# Altium PCB PHOTODIODE_V1.3.0.PcbDoc (part 2 of 3)
Units mm, origin at the board's own origin, x right, y up, seen from the top; angles counter-clockwise.
Board outline 86 x 86 mm, 4 copper layers (L1_TOP, L2_GND, L3_SIGNAL, L4_BOT); 134 components, 78 nets, 520 pads, 1315 vias.
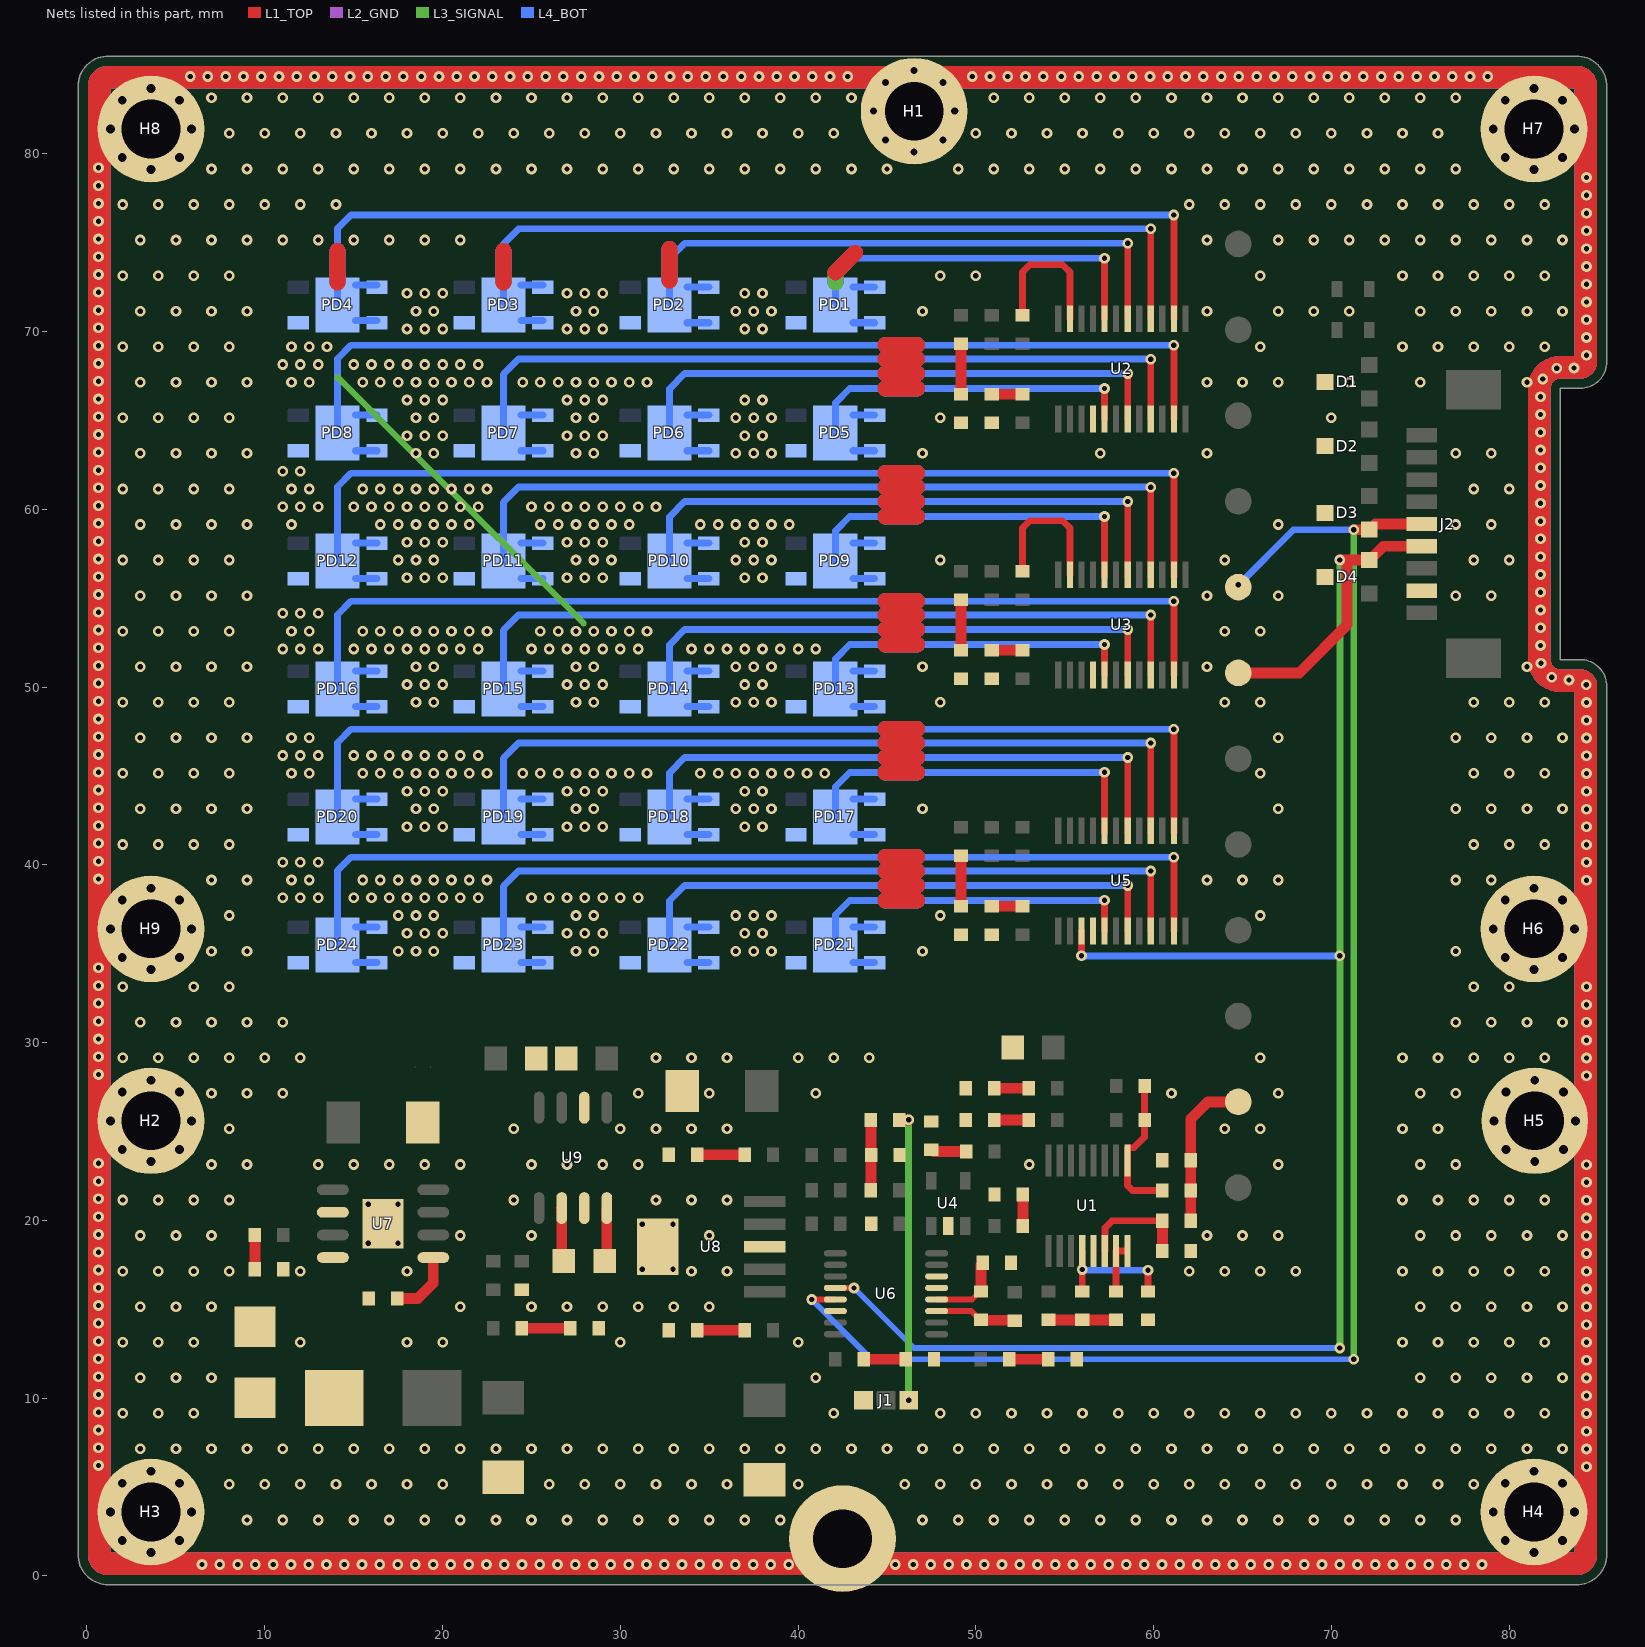
[diagram p4: the nets of this part, all layers, seen from the top]

## Via types
v1: diameter 0.6, hole 0.3, L1_TOP to L4_BOT, tented both sides, 1045 vias
v2: diameter 0.6, hole 0.3, L1_TOP to L4_BOT, 270 vias

## Nets (pads, with @x,y where several pads share a name; then routed paths per layer and width w, separated by ;. In a path a pad name is that pad's centre, name@x,y a point inside that pad or via, vN(x,y) a via of type N, cw(c..) or ccw(c..) an arc to the next point about the centre after c; other vN are vias at no path point) (continued)
GND: C4.1 C5.1 C6.1 C7.1 C8.1 C12.1 C13.1 C16.1 C17.1 C20.1 C21.1 C22.2 C25.1 C26.1 C30.1 C31.1 C32.1 C36.2 C37.2 C38.1 C39.1 C42.2 C43.2 C44.1 C45.1 C46.2 C48.1 D1.2 D2.2 D3.2 D4.2 D5.1 H1.1 H2.1 H3.1 H4.1 H5.1 H6.1 H7.1 H8.1 H9.1 J1.1 J2.2 pad.1 PD1.1 PD2.1 PD3.1 PD4.1 PD5.1 PD6.1 PD7.1 PD8.1 PD9.1 PD10.1 PD11.1 PD12.1 PD13.1 PD14.1 PD15.1 PD16.1 PD17.1 PD18.1 PD19.1 PD20.1 PD21.1 PD22.1 PD23.1 PD24.1 R13.1 R17.2 R23.1 U1.13 U2.4 U3.4 U4.2 U5.4 U6.5 U6.6 U6.14 U7.6 U7.9 U8.3 U8.6 U9.3 U9.6 | length 1497.7
  L1_TOP w0.9: 14.1,72.749 14.1,74.527 ; 23.434,72.749 23.434,74.527 ; 32.768,72.869 32.768,74.647 ; 42.102,73.322 43.202,74.422 ; 44.909,38.002 46.687,38.002 ; 44.909,38.838 46.687,38.838 ; 44.909,39.653 46.687,39.653 ; 44.909,40.435 46.687,40.435 ; 44.909,45.202 46.687,45.202 ; 44.909,46.038 46.687,46.038 ; 44.909,46.853 46.687,46.853 ; 44.909,47.635 46.687,47.635 ; 44.909,52.402 46.687,52.402 ; 44.909,53.238 46.687,53.238 ; 44.909,54.053 46.687,54.053 ; 44.909,54.835 46.687,54.835 ; 44.909,59.602 46.687,59.602 ; 44.909,60.438 46.687,60.438 ; 44.909,61.253 46.687,61.253 ; 44.909,62.035 46.687,62.035 ; 44.909,66.802 46.687,66.802 ; 44.909,67.638 46.687,67.638 ; 44.909,68.453 46.687,68.453 ; 44.909,69.235 46.687,69.235
  L1_TOP w1.27: 0.685,83.794 0.685,82.209 0.685,81.209 0.685,80.209 0.685,79.209 0.685,78.209 0.685,77.209 0.685,76.209 0.685,75.209 0.685,74.209 0.685,73.209 0.685,72.209 0.685,71.209 0.685,70.209 0.685,69.209 0.685,68.209 0.685,67.209 0.685,66.209 0.685,65.209 0.685,64.209 0.685,63.209 0.685,62.209 0.685,61.209 0.685,60.209 0.685,59.209 0.685,58.209 0.685,57.209 0.685,56.209 0.685,55.209 0.685,54.209 0.685,53.209 0.685,52.209 0.685,51.209 0.685,50.209 0.685,49.209 0.685,48.209 0.685,47.209 0.685,46.209 0.685,45.209 0.685,44.209 0.685,43.209 0.685,42.209 0.685,41.209 0.685,40.209 0.685,39.209 0.685,38.209 0.685,37.209 0.685,36.209 0.685,35.209 0.685,34.209 0.685,33.209 0.685,32.209 0.685,31.209 0.685,30.209 0.685,29.209 0.685,28.209 0.685,27.209 0.685,26.209 0.685,25.209 0.685,24.209 0.685,23.209 0.685,22.209 0.685,21.209 0.685,20.209 0.685,19.209 0.685,18.209 0.685,17.209 0.685,16.209 0.685,15.209 0.685,14.209 0.685,13.209 0.685,12.209 0.685,11.209 0.685,10.209 0.685,9.209 0.685,8.209 0.685,7.209 0.685,6.209 0.685,5.209 0.685,4.209 0.685,3.209 0.685,2.209 0.685,1.2 ccw(c1.2,1.2) 1.2,0.685 ; 0.685,83.8 cw(c1.2,83.8) 1.2,84.315 2.802,84.315 3.802,84.315 4.802,84.315 5.802,84.315 6.802,84.315 7.802,84.315 8.802,84.315 9.802,84.315 10.802,84.315 11.802,84.315 12.802,84.315 13.802,84.315 14.802,84.315 15.802,84.315 16.802,84.315 17.802,84.315 18.802,84.315 19.802,84.315 20.802,84.315 21.802,84.315 22.802,84.315 23.802,84.315 24.802,84.315 25.802,84.315 26.802,84.315 27.802,84.315 28.802,84.315 29.802,84.315 30.802,84.315 31.802,84.315 32.802,84.315 33.802,84.315 34.802,84.315 35.802,84.315 36.802,84.315 37.802,84.315 38.802,84.315 39.802,84.315 40.802,84.315 41.802,84.315 42.802,84.315 43.802,84.315 44.802,84.315 45.655,84.315 46.53,84.315 47.405,84.315 48.802,84.315 49.802,84.315 50.802,84.315 51.802,84.315 52.802,84.315 53.802,84.315 54.802,84.315 55.802,84.315 56.802,84.315 57.802,84.315 58.802,84.315 59.802,84.315 60.802,84.315 61.802,84.315 62.802,84.315 63.802,84.315 64.802,84.315 65.802,84.315 66.802,84.315 67.802,84.315 68.802,84.315 69.802,84.315 70.802,84.315 71.802,84.315 72.802,84.315 73.802,84.315 74.802,84.315 75.802,84.315 76.802,84.315 77.802,84.315 78.802,84.315 79.802,84.315 80.802,84.315 81.802,84.315 82.802,84.315 83.794,84.315 ; 1.206,0.685 2.475,0.685 3.475,0.685 4.475,0.685 5.475,0.685 6.475,0.685 7.475,0.685 8.475,0.685 9.475,0.685 10.475,0.685 11.475,0.685 12.475,0.685 13.475,0.685 14.475,0.685 15.475,0.685 16.475,0.685 17.475,0.685 18.474,0.685 19.474,0.685 20.474,0.685 21.474,0.685 22.474,0.685 23.474,0.685 24.474,0.685 25.474,0.685 26.474,0.685 27.474,0.685 28.474,0.685 29.474,0.685 30.474,0.685 31.474,0.685 32.474,0.685 33.474,0.685 34.474,0.685 35.474,0.685 36.474,0.685 37.474,0.685 38.474,0.685 39.474,0.685 40.474,0.685 42.5,0.685 44.474,0.685 45.474,0.685 46.474,0.685 47.474,0.685 48.474,0.685 49.474,0.685 50.474,0.685 51.474,0.685 52.474,0.685 53.474,0.685 54.474,0.685 55.474,0.685 56.474,0.685 57.474,0.685 58.474,0.685 59.474,0.685 60.474,0.685 61.474,0.685 62.474,0.685 63.474,0.685 64.474,0.685 65.474,0.685 66.474,0.685 67.474,0.685 68.474,0.685 69.474,0.685 70.474,0.685 71.474,0.685 72.474,0.685 73.474,0.685 74.474,0.685 75.474,0.685 76.474,0.685 77.474,0.685 78.474,0.685 79.474,0.685 80.474,0.685 81.474,0.685 82.474,0.685 83.8,0.685 ccw(c83.8,1.2) 84.315,1.2 ; 83.8,84.315 cw(c83.8,83.8) 84.315,83.8 84.315,82.665 84.315,81.665 84.315,80.665 84.315,79.665 84.315,78.665 84.315,77.665 84.315,76.665 84.315,75.665 84.315,74.665 84.315,73.665 84.315,72.665 84.315,71.665 84.315,70.665 84.315,69.665 84.315,68.31 ; 84.315,1.204 84.315,2.139 84.315,3.139 84.315,4.139 84.315,5.139 84.315,6.139 84.315,7.139 84.315,8.139 84.315,9.139 84.315,10.139 84.315,11.139 84.315,12.139 84.315,13.139 84.315,14.139 84.315,15.139 84.315,16.139 84.315,17.139 84.315,18.139 84.315,19.139 84.315,20.139 84.315,21.139 84.315,22.139 84.315,23.139 84.315,24.139 84.315,25.139 84.315,26.139 84.315,27.139 84.315,28.139 84.315,29.139 84.315,30.139 84.315,31.139 84.315,32.139 84.315,33.139 84.315,34.139 84.315,35.139 84.315,36.139 84.315,37.139 84.315,38.139 84.315,39.139 84.315,40.139 84.315,41.139 84.315,42.139 84.315,43.139 84.315,44.139 84.315,45.139 84.315,46.139 84.315,47.139 84.315,48.139 84.315,49.139 84.315,50.05 ccw(c84,50.05) 84,50.365 82.886,50.365 cw(c82.886,51.55) 81.701,51.55 81.701,52.316 81.701,53.316 81.701,54.316 81.701,55.316 81.701,56.316 81.701,57.316 81.701,58.316 81.701,59.316 81.701,60.316 81.701,61.316 81.701,62.316 81.701,63.316 81.701,64.316 81.701,65.316 81.701,66.806 cw(c82.886,66.806) 82.886,67.991 84,67.991 ccw(c84,68.306) 84.315,68.306
  L2_GND w0.9: 14.1,72.749 14.1,74.527 ; 23.434,72.749 23.434,74.527 ; 32.768,72.869 32.768,74.647 ; 42.102,73.322 43.202,74.422 ; 44.909,38.002 46.687,38.002 ; 44.909,38.838 46.687,38.838 ; 44.909,39.653 46.687,39.653 ; 44.909,40.435 46.687,40.435 ; 44.909,45.202 46.687,45.202 ; 44.909,46.038 46.687,46.038 ; 44.909,46.853 46.687,46.853 ; 44.909,47.635 46.687,47.635 ; 44.909,52.402 46.687,52.402 ; 44.909,53.238 46.687,53.238 ; 44.909,54.053 46.687,54.053 ; 44.909,54.835 46.687,54.835 ; 44.909,59.602 46.687,59.602 ; 44.909,60.438 46.687,60.438 ; 44.909,61.253 46.687,61.253 ; 44.909,62.035 46.687,62.035 ; 44.909,66.802 46.687,66.802 ; 44.909,67.638 46.687,67.638 ; 44.909,68.453 46.687,68.453 ; 44.909,69.235 46.687,69.235
  L2_GND w1.27: 0.685,83.794 0.685,82.209 0.685,81.209 0.685,80.209 0.685,79.209 0.685,78.209 0.685,77.209 0.685,76.209 0.685,75.209 0.685,74.209 0.685,73.209 0.685,72.209 0.685,71.209 0.685,70.209 0.685,69.209 0.685,68.209 0.685,67.209 0.685,66.209 0.685,65.209 0.685,64.209 0.685,63.209 0.685,62.209 0.685,61.209 0.685,60.209 0.685,59.209 0.685,58.209 0.685,57.209 0.685,56.209 0.685,55.209 0.685,54.209 0.685,53.209 0.685,52.209 0.685,51.209 0.685,50.209 0.685,49.209 0.685,48.209 0.685,47.209 0.685,46.209 0.685,45.209 0.685,44.209 0.685,43.209 0.685,42.209 0.685,41.209 0.685,40.209 0.685,39.209 0.685,38.209 0.685,37.209 0.685,36.209 0.685,35.209 0.685,34.209 0.685,33.209 0.685,32.209 0.685,31.209 0.685,30.209 0.685,29.209 0.685,28.209 0.685,27.209 0.685,26.209 0.685,25.209 0.685,24.209 0.685,23.209 0.685,22.209 0.685,21.209 0.685,20.209 0.685,19.209 0.685,18.209 0.685,17.209 0.685,16.209 0.685,15.209 0.685,14.209 0.685,13.209 0.685,12.209 0.685,11.209 0.685,10.209 0.685,9.209 0.685,8.209 0.685,7.209 0.685,6.209 0.685,5.209 0.685,4.209 0.685,3.209 0.685,2.209 0.685,1.2 ccw(c1.2,1.2) 1.2,0.685 ; 0.685,83.8 cw(c1.2,83.8) 1.2,84.315 2.802,84.315 3.802,84.315 4.802,84.315 5.802,84.315 6.802,84.315 7.802,84.315 8.802,84.315 9.802,84.315 10.802,84.315 11.802,84.315 12.802,84.315 13.802,84.315 14.802,84.315 15.802,84.315 16.802,84.315 17.802,84.315 18.802,84.315 19.802,84.315 20.802,84.315 21.802,84.315 22.802,84.315 23.802,84.315 24.802,84.315 25.802,84.315 26.802,84.315 27.802,84.315 28.802,84.315 29.802,84.315 30.802,84.315 31.802,84.315 32.802,84.315 33.802,84.315 34.802,84.315 35.802,84.315 36.802,84.315 37.802,84.315 38.802,84.315 39.802,84.315 40.802,84.315 41.802,84.315 42.802,84.315 43.802,84.315 44.802,84.315 45.655,84.315 46.53,84.315 47.405,84.315 48.802,84.315 49.802,84.315 50.802,84.315 51.802,84.315 52.802,84.315 53.802,84.315 54.802,84.315 55.802,84.315 56.802,84.315 57.802,84.315 58.802,84.315 59.802,84.315 60.802,84.315 61.802,84.315 62.802,84.315 63.802,84.315 64.802,84.315 65.802,84.315 66.802,84.315 67.802,84.315 68.802,84.315 69.802,84.315 70.802,84.315 71.802,84.315 72.802,84.315 73.802,84.315 74.802,84.315 75.802,84.315 76.802,84.315 77.802,84.315 78.802,84.315 79.802,84.315 80.802,84.315 81.802,84.315 82.802,84.315 83.794,84.315 ; 1.206,0.685 2.475,0.685 3.475,0.685 4.475,0.685 5.475,0.685 6.475,0.685 7.475,0.685 8.475,0.685 9.475,0.685 10.475,0.685 11.475,0.685 12.475,0.685 13.475,0.685 14.475,0.685 15.475,0.685 16.475,0.685 17.475,0.685 18.474,0.685 19.474,0.685 20.474,0.685 21.474,0.685 22.474,0.685 23.474,0.685 24.474,0.685 25.474,0.685 26.474,0.685 27.474,0.685 28.474,0.685 29.474,0.685 30.474,0.685 31.474,0.685 32.474,0.685 33.474,0.685 34.474,0.685 35.474,0.685 36.474,0.685 37.474,0.685 38.474,0.685 39.474,0.685 40.474,0.685 42.5,0.685 44.474,0.685 45.474,0.685 46.474,0.685 47.474,0.685 48.474,0.685 49.474,0.685 50.474,0.685 51.474,0.685 52.474,0.685 53.474,0.685 54.474,0.685 55.474,0.685 56.474,0.685 57.474,0.685 58.474,0.685 59.474,0.685 60.474,0.685 61.474,0.685 62.474,0.685 63.474,0.685 64.474,0.685 65.474,0.685 66.474,0.685 67.474,0.685 68.474,0.685 69.474,0.685 70.474,0.685 71.474,0.685 72.474,0.685 73.474,0.685 74.474,0.685 75.474,0.685 76.474,0.685 77.474,0.685 78.474,0.685 79.474,0.685 80.474,0.685 81.474,0.685 82.474,0.685 83.8,0.685 ccw(c83.8,1.2) 84.315,1.2 ; 83.8,84.315 cw(c83.8,83.8) 84.315,83.8 84.315,82.665 84.315,81.665 84.315,80.665 84.315,79.665 84.315,78.665 84.315,77.665 84.315,76.665 84.315,75.665 84.315,74.665 84.315,73.665 84.315,72.665 84.315,71.665 84.315,70.665 84.315,69.665 84.315,68.31 ; 84.315,1.204 84.315,2.139 84.315,3.139 84.315,4.139 84.315,5.139 84.315,6.139 84.315,7.139 84.315,8.139 84.315,9.139 84.315,10.139 84.315,11.139 84.315,12.139 84.315,13.139 84.315,14.139 84.315,15.139 84.315,16.139 84.315,17.139 84.315,18.139 84.315,19.139 84.315,20.139 84.315,21.139 84.315,22.139 84.315,23.139 84.315,24.139 84.315,25.139 84.315,26.139 84.315,27.139 84.315,28.139 84.315,29.139 84.315,30.139 84.315,31.139 84.315,32.139 84.315,33.139 84.315,34.139 84.315,35.139 84.315,36.139 84.315,37.139 84.315,38.139 84.315,39.139 84.315,40.139 84.315,41.139 84.315,42.139 84.315,43.139 84.315,44.139 84.315,45.139 84.315,46.139 84.315,47.139 84.315,48.139 84.315,49.139 84.315,50.05 ccw(c84,50.05) 84,50.365 82.886,50.365 cw(c82.886,51.55) 81.701,51.55 81.701,52.316 81.701,53.316 81.701,54.316 81.701,55.316 81.701,56.316 81.701,57.316 81.701,58.316 81.701,59.316 81.701,60.316 81.701,61.316 81.701,62.316 81.701,63.316 81.701,64.316 81.701,65.316 81.701,66.806 cw(c82.886,66.806) 82.886,67.991 84,67.991 ccw(c84,68.306) 84.315,68.306
  L3_SIGNAL w0.35: 14.1,67.434 18.396,63.138 27.94,53.594
  L3_SIGNAL w0.9: 14.1,72.749 14.1,74.527 ; 23.434,72.749 23.434,74.527 ; 32.768,72.869 32.768,74.647 ; 42.102,72.749 42.102,73.322 43.202,74.422 ; 44.909,38.002 46.687,38.002 ; 44.909,38.838 46.687,38.838 ; 44.909,39.653 46.687,39.653 ; 44.909,40.435 46.687,40.435 ; 44.909,45.202 46.687,45.202 ; 44.909,46.038 46.687,46.038 ; 44.909,46.853 46.687,46.853 ; 44.909,47.635 46.687,47.635 ; 44.909,52.402 46.687,52.402 ; 44.909,53.238 46.687,53.238 ; 44.909,54.053 46.687,54.053 ; 44.909,54.835 46.687,54.835 ; 44.909,59.602 46.687,59.602 ; 44.909,60.438 46.687,60.438 ; 44.909,61.253 46.687,61.253 ; 44.909,62.035 46.687,62.035 ; 44.909,66.802 46.687,66.802 ; 44.909,67.638 46.687,67.638 ; 44.909,68.453 46.687,68.453 ; 44.909,69.235 46.687,69.235
  L3_SIGNAL w1.27: 0.685,83.794 0.685,82.209 0.685,81.209 0.685,80.209 0.685,79.209 0.685,78.209 0.685,77.209 0.685,76.209 0.685,75.209 0.685,74.209 0.685,73.209 0.685,72.209 0.685,71.209 0.685,70.209 0.685,69.209 0.685,68.209 0.685,67.209 0.685,66.209 0.685,65.209 0.685,64.209 0.685,63.209 0.685,62.209 0.685,61.209 0.685,60.209 0.685,59.209 0.685,58.209 0.685,57.209 0.685,56.209 0.685,55.209 0.685,54.209 0.685,53.209 0.685,52.209 0.685,51.209 0.685,50.209 0.685,49.209 0.685,48.209 0.685,47.209 0.685,46.209 0.685,45.209 0.685,44.209 0.685,43.209 0.685,42.209 0.685,41.209 0.685,40.209 0.685,39.209 0.685,38.209 0.685,37.209 0.685,36.209 0.685,35.209 0.685,34.209 0.685,33.209 0.685,32.209 0.685,31.209 0.685,30.209 0.685,29.209 0.685,28.209 0.685,27.209 0.685,26.209 0.685,25.209 0.685,24.209 0.685,23.209 0.685,22.209 0.685,21.209 0.685,20.209 0.685,19.209 0.685,18.209 0.685,17.209 0.685,16.209 0.685,15.209 0.685,14.209 0.685,13.209 0.685,12.209 0.685,11.209 0.685,10.209 0.685,9.209 0.685,8.209 0.685,7.209 0.685,6.209 0.685,5.209 0.685,4.209 0.685,3.209 0.685,2.209 0.685,1.2 ccw(c1.2,1.2) 1.2,0.685 ; 0.685,83.8 cw(c1.2,83.8) 1.2,84.315 2.802,84.315 3.802,84.315 4.802,84.315 5.802,84.315 6.802,84.315 7.802,84.315 8.802,84.315 9.802,84.315 10.802,84.315 11.802,84.315 12.802,84.315 13.802,84.315 14.802,84.315 15.802,84.315 16.802,84.315 17.802,84.315 18.802,84.315 19.802,84.315 20.802,84.315 21.802,84.315 22.802,84.315 23.802,84.315 24.802,84.315 25.802,84.315 26.802,84.315 27.802,84.315 28.802,84.315 29.802,84.315 30.802,84.315 31.802,84.315 32.802,84.315 33.802,84.315 34.802,84.315 35.802,84.315 36.802,84.315 37.802,84.315 38.802,84.315 39.802,84.315 40.802,84.315 41.802,84.315 42.802,84.315 43.802,84.315 44.802,84.315 45.655,84.315 46.53,84.315 47.405,84.315 48.802,84.315 49.802,84.315 50.802,84.315 51.802,84.315 52.802,84.315 53.802,84.315 54.802,84.315 55.802,84.315 56.802,84.315 57.802,84.315 58.802,84.315 59.802,84.315 60.802,84.315 61.802,84.315 62.802,84.315 63.802,84.315 64.802,84.315 65.802,84.315 66.802,84.315 67.802,84.315 68.802,84.315 69.802,84.315 70.802,84.315 71.802,84.315 72.802,84.315 73.802,84.315 74.802,84.315 75.802,84.315 76.802,84.315 77.802,84.315 78.802,84.315 79.802,84.315 80.802,84.315 81.802,84.315 82.802,84.315 83.794,84.315 ; 1.206,0.685 2.475,0.685 3.475,0.685 4.475,0.685 5.475,0.685 6.475,0.685 7.475,0.685 8.475,0.685 9.475,0.685 10.475,0.685 11.475,0.685 12.475,0.685 13.475,0.685 14.475,0.685 15.475,0.685 16.475,0.685 17.475,0.685 18.474,0.685 19.474,0.685 20.474,0.685 21.474,0.685 22.474,0.685 23.474,0.685 24.474,0.685 25.474,0.685 26.474,0.685 27.474,0.685 28.474,0.685 29.474,0.685 30.474,0.685 31.474,0.685 32.474,0.685 33.474,0.685 34.474,0.685 35.474,0.685 36.474,0.685 37.474,0.685 38.474,0.685 39.474,0.685 40.474,0.685 42.5,0.685 44.474,0.685 45.474,0.685 46.474,0.685 47.474,0.685 48.474,0.685 49.474,0.685 50.474,0.685 51.474,0.685 52.474,0.685 53.474,0.685 54.474,0.685 55.474,0.685 56.474,0.685 57.474,0.685 58.474,0.685 59.474,0.685 60.474,0.685 61.474,0.685 62.474,0.685 63.474,0.685 64.474,0.685 65.474,0.685 66.474,0.685 67.474,0.685 68.474,0.685 69.474,0.685 70.474,0.685 71.474,0.685 72.474,0.685 73.474,0.685 74.474,0.685 75.474,0.685 76.474,0.685 77.474,0.685 78.474,0.685 79.474,0.685 80.474,0.685 81.474,0.685 82.474,0.685 83.8,0.685 ccw(c83.8,1.2) 84.315,1.2 ; 83.8,84.315 cw(c83.8,83.8) 84.315,83.8 84.315,82.665 84.315,81.665 84.315,80.665 84.315,79.665 84.315,78.665 84.315,77.665 84.315,76.665 84.315,75.665 84.315,74.665 84.315,73.665 84.315,72.665 84.315,71.665 84.315,70.665 84.315,69.665 84.315,68.31 ; 84.315,1.204 84.315,2.139 84.315,3.139 84.315,4.139 84.315,5.139 84.315,6.139 84.315,7.139 84.315,8.139 84.315,9.139 84.315,10.139 84.315,11.139 84.315,12.139 84.315,13.139 84.315,14.139 84.315,15.139 84.315,16.139 84.315,17.139 84.315,18.139 84.315,19.139 84.315,20.139 84.315,21.139 84.315,22.139 84.315,23.139 84.315,24.139 84.315,25.139 84.315,26.139 84.315,27.139 84.315,28.139 84.315,29.139 84.315,30.139 84.315,31.139 84.315,32.139 84.315,33.139 84.315,34.139 84.315,35.139 84.315,36.139 84.315,37.139 84.315,38.139 84.315,39.139 84.315,40.139 84.315,41.139 84.315,42.139 84.315,43.139 84.315,44.139 84.315,45.139 84.315,46.139 84.315,47.139 84.315,48.139 84.315,49.139 84.315,50.05 ccw(c84,50.05) 84,50.365 82.886,50.365 cw(c82.886,51.55) 81.701,51.55 81.701,52.316 81.701,53.316 81.701,54.316 81.701,55.316 81.701,56.316 81.701,57.316 81.701,58.316 81.701,59.316 81.701,60.316 81.701,61.316 81.701,62.316 81.701,63.316 81.701,64.316 81.701,65.316 81.701,66.806 cw(c82.886,66.806) 82.886,67.991 84,67.991 ccw(c84,68.306) 84.315,68.306
  L4_BOT w1.27: 0.685,83.794 0.685,82.209 0.685,81.209 0.685,80.209 0.685,79.209 0.685,78.209 0.685,77.209 0.685,76.209 0.685,75.209 0.685,74.209 0.685,73.209 0.685,72.209 0.685,71.209 0.685,70.209 0.685,69.209 0.685,68.209 0.685,67.209 0.685,66.209 0.685,65.209 0.685,64.209 0.685,63.209 0.685,62.209 0.685,61.209 0.685,60.209 0.685,59.209 0.685,58.209 0.685,57.209 0.685,56.209 0.685,55.209 0.685,54.209 0.685,53.209 0.685,52.209 0.685,51.209 0.685,50.209 0.685,49.209 0.685,48.209 0.685,47.209 0.685,46.209 0.685,45.209 0.685,44.209 0.685,43.209 0.685,42.209 0.685,41.209 0.685,40.209 0.685,39.209 0.685,38.209 0.685,37.209 0.685,36.209 0.685,35.209 0.685,34.209 0.685,33.209 0.685,32.209 0.685,31.209 0.685,30.209 0.685,29.209 0.685,28.209 0.685,27.209 0.685,26.209 0.685,25.209 0.685,24.209 0.685,23.209 0.685,22.209 0.685,21.209 0.685,20.209 0.685,19.209 0.685,18.209 0.685,17.209 0.685,16.209 0.685,15.209 0.685,14.209 0.685,13.209 0.685,12.209 0.685,11.209 0.685,10.209 0.685,9.209 0.685,8.209 0.685,7.209 0.685,6.209 0.685,5.209 0.685,4.209 0.685,3.209 0.685,2.209 0.685,1.2 ccw(c1.2,1.2) 1.2,0.685 ; 0.685,83.8 cw(c1.2,83.8) 1.2,84.315 2.802,84.315 3.802,84.315 4.802,84.315 5.802,84.315 6.802,84.315 7.802,84.315 8.802,84.315 9.802,84.315 10.802,84.315 11.802,84.315 12.802,84.315 13.802,84.315 14.802,84.315 15.802,84.315 16.802,84.315 17.802,84.315 18.802,84.315 19.802,84.315 20.802,84.315 21.802,84.315 22.802,84.315 23.802,84.315 24.802,84.315 25.802,84.315 26.802,84.315 27.802,84.315 28.802,84.315 29.802,84.315 30.802,84.315 31.802,84.315 32.802,84.315 33.802,84.315 34.802,84.315 35.802,84.315 36.802,84.315 37.802,84.315 38.802,84.315 39.802,84.315 40.802,84.315 41.802,84.315 42.802,84.315 43.802,84.315 44.802,84.315 45.655,84.315 46.53,84.315 47.405,84.315 48.802,84.315 49.802,84.315 50.802,84.315 51.802,84.315 52.802,84.315 53.802,84.315 54.802,84.315 55.802,84.315 56.802,84.315 57.802,84.315 58.802,84.315 59.802,84.315 60.802,84.315 61.802,84.315 62.802,84.315 63.802,84.315 64.802,84.315 65.802,84.315 66.802,84.315 67.802,84.315 68.802,84.315 69.802,84.315 70.802,84.315 71.802,84.315 72.802,84.315 73.802,84.315 74.802,84.315 75.802,84.315 76.802,84.315 77.802,84.315 78.802,84.315 79.802,84.315 80.802,84.315 81.802,84.315 82.802,84.315 83.794,84.315 ; 1.206,0.685 2.475,0.685 3.475,0.685 4.475,0.685 5.475,0.685 6.475,0.685 7.475,0.685 8.475,0.685 9.475,0.685 10.475,0.685 11.475,0.685 12.475,0.685 13.475,0.685 14.475,0.685 15.475,0.685 16.475,0.685 17.475,0.685 18.474,0.685 19.474,0.685 20.474,0.685 21.474,0.685 22.474,0.685 23.474,0.685 24.474,0.685 25.474,0.685 26.474,0.685 27.474,0.685 28.474,0.685 29.474,0.685 30.474,0.685 31.474,0.685 32.474,0.685 33.474,0.685 34.474,0.685 35.474,0.685 36.474,0.685 37.474,0.685 38.474,0.685 39.474,0.685 40.474,0.685 42.5,0.685 44.474,0.685 45.474,0.685 46.474,0.685 47.474,0.685 48.474,0.685 49.474,0.685 50.474,0.685 51.474,0.685 52.474,0.685 53.474,0.685 54.474,0.685 55.474,0.685 56.474,0.685 57.474,0.685 58.474,0.685 59.474,0.685 60.474,0.685 61.474,0.685 62.474,0.685 63.474,0.685 64.474,0.685 65.474,0.685 66.474,0.685 67.474,0.685 68.474,0.685 69.474,0.685 70.474,0.685 71.474,0.685 72.474,0.685 73.474,0.685 74.474,0.685 75.474,0.685 76.474,0.685 77.474,0.685 78.474,0.685 79.474,0.685 80.474,0.685 81.474,0.685 82.474,0.685 83.8,0.685 ccw(c83.8,1.2) 84.315,1.2 ; 83.8,84.315 cw(c83.8,83.8) 84.315,83.8 84.315,82.665 84.315,81.665 84.315,80.665 84.315,79.665 84.315,78.665 84.315,77.665 84.315,76.665 84.315,75.665 84.315,74.665 84.315,73.665 84.315,72.665 84.315,71.665 84.315,70.665 84.315,69.665 84.315,68.31 ; 84.315,1.204 84.315,2.139 84.315,3.139 84.315,4.139 84.315,5.139 84.315,6.139 84.315,7.139 84.315,8.139 84.315,9.139 84.315,10.139 84.315,11.139 84.315,12.139 84.315,13.139 84.315,14.139 84.315,15.139 84.315,16.139 84.315,17.139 84.315,18.139 84.315,19.139 84.315,20.139 84.315,21.139 84.315,22.139 84.315,23.139 84.315,24.139 84.315,25.139 84.315,26.139 84.315,27.139 84.315,28.139 84.315,29.139 84.315,30.139 84.315,31.139 84.315,32.139 84.315,33.139 84.315,34.139 84.315,35.139 84.315,36.139 84.315,37.139 84.315,38.139 84.315,39.139 84.315,40.139 84.315,41.139 84.315,42.139 84.315,43.139 84.315,44.139 84.315,45.139 84.315,46.139 84.315,47.139 84.315,48.139 84.315,49.139 84.315,50.05 ccw(c84,50.05) 84,50.365 82.886,50.365 cw(c82.886,51.55) 81.701,51.55 81.701,52.316 81.701,53.316 81.701,54.316 81.701,55.316 81.701,56.316 81.701,57.316 81.701,58.316 81.701,59.316 81.701,60.316 81.701,61.316 81.701,62.316 81.701,63.316 81.701,64.316 81.701,65.316 81.701,66.806 cw(c82.886,66.806) 82.886,67.991 84,67.991 ccw(c84,68.306) 84.315,68.306
  other v1: 9.007,3.149 11.007,3.149 13.007,3.149 15.007,3.149 17.007,3.149 19.007,3.149 21.007,3.149 23.007,3.149 25.007,3.149 27.007,3.149 29.007,3.149 31.007,3.149 33.007,3.149 35.007,3.149 37.007,3.149 39.007,3.149 47.007,3.149 49.007,3.149 51.007,3.149 53.007,3.149 55.007,3.149 57.007,3.149 59.007,3.149 61.007,3.149 63.007,3.149 65.007,3.149 67.007,3.149 69.007,3.149 71.007,3.149 73.007,3.149 75.007,3.149 77.007,3.149 8.007,5.149 10.007,5.149 12.007,5.149 14.007,5.149 16.007,5.149 18.007,5.149 20.007,5.149 26.007,5.149 28.007,5.149 30.007,5.149 32.007,5.149 34.007,5.149 36.007,5.149 40.007,5.149 46.007,5.149 48.007,5.149 50.007,5.149 52.007,5.149 54.007,5.149 56.007,5.149 58.007,5.149 60.007,5.149 62.007,5.149 64.007,5.149 66.007,5.149 68.007,5.149 70.007,5.149 72.007,5.149 74.007,5.149 76.007,5.149 78.007,5.149 3.007,7.149 5.007,7.149 7.007,7.149 9.007,7.149 11.007,7.149 13.007,7.149 15.007,7.149 17.007,7.149 19.007,7.149 21.007,7.149 23.007,7.149 25.007,7.149 27.007,7.149 29.007,7.149 31.007,7.149 33.007,7.149 35.007,7.149 37.007,7.149 39.007,7.149 41.007,7.149 43.007,7.149 45.007,7.149 47.007,7.149 49.007,7.149 51.007,7.149 53.007,7.149 55.007,7.149 57.007,7.149 59.007,7.149 61.007,7.149 63.007,7.149 65.007,7.149 67.007,7.149 69.007,7.149 71.007,7.149 73.007,7.149 75.007,7.149 77.007,7.149 79.007,7.149 81.007,7.149 83.007,7.149 2.007,9.149 4.007,9.149 6.007,9.149 42.007,9.149 48.007,9.149 50.007,9.149 52.007,9.149 54.007,9.149 56.007,9.149 58.007,9.149 60.007,9.149 62.007,9.149 64.007,9.149 66.007,9.149 68.007,9.149 70.007,9.149 72.007,9.149 74.007,9.149 76.007,9.149 78.007,9.149 80.007,9.149 82.007,9.149 3.007,11.149 5.007,11.149 7.007,11.149 41.007,11.149 75.007,11.149 77.007,11.149 79.007,11.149 81.007,11.149 83.007,11.149 2.007,13.149 4.007,13.149 6.007,13.149 12.007,13.149 18.007,13.149 20.007,13.149 30.007,13.149 40.007,13.149 74.007,13.149 76.007,13.149 78.007,13.149 80.007,13.149 82.007,13.149 3.007,15.149 5.007,15.149 7.007,15.149 21.007,15.149 25.007,15.149 27.007,15.149 29.007,15.149 31.007,15.149 33.007,15.149 35.007,15.149 75.007,15.149 77.007,15.149 79.007,15.149 81.007,15.149 83.007,15.149 2.007,17.149 4.007,17.149 6.007,17.149 8.007,17.149 12.007,17.149 18.007,17.149 34.007,17.149 36.007,17.149 62.007,17.149 64.007,17.149 66.007,17.149 68.007,17.149 74.007,17.149 76.007,17.149 78.007,17.149 80.007,17.149 82.007,17.149 31.242,17.247 32.969,17.247 15.824,18.72 17.501,18.72 3.007,19.149 5.007,19.149 7.007,19.149 21.007,19.149 25.007,19.149 35.007,19.149 63.007,19.149 65.007,19.149 67.007,19.149 75.007,19.149 77.007,19.149 79.007,19.149 81.007,19.149 83.007,19.149 31.242,19.787 32.969,19.787 15.824,20.904 17.501,20.904 2.007,21.149 4.007,21.149 6.007,21.149 8.007,21.149 24.007,21.149 32.007,21.149 34.007,21.149 36.007,21.149 74.007,21.149 76.007,21.149 78.007,21.149 80.007,21.149 82.007,21.149 7.007,23.149 9.007,23.149 13.007,23.149 15.007,23.149 17.007,23.149 19.007,23.149 21.007,23.149 25.007,23.149 27.007,23.149 29.007,23.149 31.007,23.149 53.007,23.149 67.007,23.149 75.007,23.149 77.007,23.149 8.007,25.149 24.007,25.149 30.007,25.149 32.007,25.149 34.007,25.149 36.007,25.149 64.007,25.149 66.007,25.149 74.007,25.149 76.007,25.149 7.007,27.149 9.007,27.149 11.007,27.149 31.007,27.149 35.007,27.149 41.007,27.149 61.007,27.149 67.007,27.149 75.007,27.149 77.007,27.149 2.007,29.149 4.007,29.149 6.007,29.149 8.007,29.149 10.007,29.149 12.007,29.149 32.007,29.149 34.007,29.149 36.007,29.149 40.007,29.149 42.007,29.149 44.007,29.149 66.007,29.149 74.007,29.149 76.007,29.149 78.007,29.149 80.007,29.149 82.007,29.149 3.007,31.149 5.007,31.149 7.007,31.149 9.007,31.149 11.007,31.149 77.007,31.149 79.007,31.149 81.007,31.149 83.007,31.149 2.007,33.149 6.007,33.149 8.007,33.149 78.007,33.149 80.007,33.149 7.007,35.149 9.007,35.149 17.507,35.149 18.507,35.149 19.507,35.149 27.507,35.149 28.507,35.149 36.507,35.149 37.507,35.149 38.507,35.149 47.007,35.149 77.007,35.149 18.007,36.149 19.007,36.149 20.007,36.149 27.007,36.149 28.007,36.149 29.007,36.149 37.007,36.149 38.007,36.149 8.007,37.149 17.507,37.149 18.507,37.149 19.507,37.149 27.507,37.149 28.507,37.149 36.507,37.149 37.507,37.149 38.507,37.149 48.007,37.149 66.007,37.149 11.007,38.149 12.007,38.149 13.007,38.149 15.007,38.149 16.007,38.149 17.007,38.149 18.007,38.149 19.007,38.149 20.007,38.149 21.007,38.149 22.007,38.149 25.007,38.149 26.007,38.149 27.007,38.149 28.007,38.149 29.007,38.149 30.007,38.149 31.007,38.149 7.007,39.149 9.007,39.149 11.507,39.149 12.507,39.149 15.507,39.149 16.507,39.149 17.507,39.149 18.507,39.149 19.507,39.149 20.507,39.149 21.507,39.149 22.507,39.149 63.007,39.149 65.007,39.149 67.007,39.149 77.007,39.149 79.007,39.149 11.007,40.149 12.007,40.149 13.007,40.149 2.007,41.149 4.007,41.149 6.007,41.149 8.007,41.149 78.007,41.149 80.007,41.149 82.007,41.149 18.007,42.149 19.007,42.149 20.007,42.149 27.007,42.149 28.007,42.149 29.007,42.149 37.007,42.149 38.007,42.149 3.007,43.149 5.007,43.149 7.007,43.149 9.007,43.149 18.507,43.149 19.507,43.149 27.507,43.149 28.507,43.149 36.507,43.149 37.507,43.149 38.507,43.149 47.007,43.149 67.007,43.149 77.007,43.149 79.007,43.149 81.007,43.149 83.007,43.149 18.007,44.149 19.007,44.149 20.007,44.149 27.007,44.149 28.007,44.149 29.007,44.149 37.007,44.149 38.007,44.149 2.007,45.149 4.007,45.149 6.007,45.149 8.007,45.149 11.507,45.149 12.507,45.149 15.507,45.149 16.507,45.149 17.507,45.149 18.507,45.149 19.507,45.149 20.507,45.149 21.507,45.149 22.507,45.149 24.507,45.149 25.507,45.149 26.507,45.149 27.507,45.149 28.507,45.149 29.507,45.149 30.507,45.149 31.507,45.149 34.507,45.149 35.507,45.149 36.507,45.149 37.507,45.149 38.507,45.149 39.507,45.149 40.507,45.149 41.507,45.149 66.007,45.149 78.007,45.149 80.007,45.149 82.007,45.149 11.007,46.149 12.007,46.149 13.007,46.149 15.007,46.149 16.007,46.149 17.007,46.149 18.007,46.149 19.007,46.149 20.007,46.149 21.007,46.149 22.007,46.149 3.007,47.149 5.007,47.149 7.007,47.149 9.007,47.149 11.507,47.149 12.507,47.149 67.007,47.149 77.007,47.149 79.007,47.149 81.007,47.149 83.007,47.149 2.007,49.149 4.007,49.149 6.007,49.149 8.007,49.149 18.507,49.149 19.507,49.149 27.507,49.149 28.507,49.149 36.507,49.149 37.507,49.149 38.507,49.149 48.007,49.149 64.007,49.149 66.007,49.149 78.007,49.149 80.007,49.149 82.007,49.149 18.007,50.149 19.007,50.149 20.007,50.149 27.007,50.149 28.007,50.149 29.007,50.149 37.007,50.149 38.007,50.149 3.007,51.149 5.007,51.149 7.007,51.149 9.007,51.149 18.507,51.149 19.507,51.149 27.507,51.149 28.507,51.149 36.507,51.149 37.507,51.149 38.507,51.149 47.007,51.149 63.007,51.149 81.007,51.149 11.007,52.149 12.007,52.149 13.007,52.149 15.007,52.149 16.007,52.149 17.007,52.149 18.007,52.149 19.007,52.149 20.007,52.149 21.007,52.149 22.007,52.149 25.007,52.149 26.007,52.149 27.007,52.149 28.007,52.149 29.007,52.149 30.007,52.149 31.007,52.149 34.007,52.149 35.007,52.149 36.007,52.149 37.007,52.149 38.007,52.149 39.007,52.149 40.007,52.149 41.007,52.149 2.007,53.149 4.007,53.149 6.007,53.149 8.007,53.149 11.507,53.149 12.507,53.149 15.507,53.149 16.507,53.149 17.507,53.149 18.507,53.149 19.507,53.149 20.507,53.149 21.507,53.149 22.507,53.149 25.507,53.149 26.507,53.149 27.507,53.149 28.507,53.149 29.507,53.149 30.507,53.149 31.507,53.149 64.007,53.149 66.007,53.149 11.007,54.149 12.007,54.149 13.007,54.149 3.007,55.149 5.007,55.149 7.007,55.149 9.007,55.149 63.007,55.149 67.007,55.149 77.007,55.149 79.007,55.149 18.007,56.149 19.007,56.149 20.007,56.149 27.007,56.149 28.007,56.149 29.007,56.149 37.007,56.149 38.007,56.149 2.007,57.149 4.007,57.149 6.007,57.149 8.007,57.149 17.507,57.149 18.507,57.149 19.507,57.149 27.507,57.149 28.507,57.149 29.507,57.149 36.507,57.149 37.507,57.149 38.507,57.149 48.007,57.149 64.007,57.149 78.007,57.149 80.007,57.149 18.007,58.149 19.007,58.149 20.007,58.149 27.007,58.149 28.007,58.149 29.007,58.149 37.007,58.149 38.007,58.149 3.007,59.149 5.007,59.149 7.007,59.149 9.007,59.149 11.507,59.149 16.507,59.149 17.507,59.149 18.507,59.149 19.507,59.149 20.507,59.149 21.507,59.149 25.507,59.149 26.507,59.149 27.507,59.149 28.507,59.149 29.507,59.149 30.507,59.149 34.507,59.149 35.507,59.149 36.507,59.149 37.507,59.149 38.507,59.149 39.507,59.149 67.007,59.149 77.007,59.149 79.007,59.149 11.007,60.149 12.007,60.149 13.007,60.149 15.007,60.149 16.007,60.149 17.007,60.149 18.007,60.149 19.007,60.149 20.007,60.149 21.007,60.149 22.007,60.149 25.007,60.149 26.007,60.149 27.007,60.149 28.007,60.149 29.007,60.149 30.007,60.149 31.007,60.149 32.007,60.149 2.007,61.149 4.007,61.149 6.007,61.149 8.007,61.149 11.507,61.149 12.507,61.149 15.507,61.149 16.507,61.149 17.507,61.149 18.507,61.149 19.507,61.149 20.507,61.149 21.507,61.149 22.507,61.149 78.007,61.149 80.007,61.149 11.007,62.149 12.007,62.149 3.007,63.149 5.007,63.149 7.007,63.149 9.007,63.149 18.507,63.149 19.507,63.149 27.507,63.149 28.507,63.149 36.507,63.149 37.507,63.149 38.507,63.149 47.007,63.149 57.007,63.149 63.007,63.149 77.007,63.149 79.007,63.149 18.007,64.149 19.007,64.149 20.007,64.149 27.007,64.149 28.007,64.149 29.007,64.149 37.007,64.149 38.007,64.149 2.007,65.149 4.007,65.149 6.007,65.149 8.007,65.149 18.507,65.149 19.507,65.149 27.507,65.149 28.507,65.149 36.507,65.149 37.507,65.149 38.507,65.149 48.007,65.149 70.007,65.149 18.007,66.149 19.007,66.149 20.007,66.149 27.007,66.149 28.007,66.149 29.007,66.149 37.007,66.149 38.007,66.149 3.007,67.149 5.007,67.149 7.007,67.149 9.007,67.149 11.507,67.149 12.507,67.149 15.507,67.149 16.507,67.149 17.507,67.149 18.507,67.149 19.507,67.149 20.507,67.149 21.507,67.149 22.507,67.149 24.507,67.149 25.507,67.149 26.507,67.149 27.507,67.149 28.507,67.149 29.507,67.149 30.507,67.149 31.507,67.149 63.007,67.149 65.007,67.149 67.007,67.149 71.007,67.149 75.007,67.149 81.007,67.149 11.007,68.149 12.007,68.149 13.007,68.149 15.007,68.149 16.007,68.149 17.007,68.149 18.007,68.149 19.007,68.149 20.007,68.149 21.007,68.149 22.007,68.149 2.007,69.149 4.007,69.149 6.007,69.149 8.007,69.149 11.507,69.149 12.507,69.149 13.507,69.149 66.007,69.149 74.007,69.149 76.007,69.149 78.007,69.149 80.007,69.149 82.007,69.149 18.007,70.149 19.007,70.149 20.007,70.149 27.007,70.149 28.007,70.149 29.007,70.149 37.007,70.149 38.007,70.149 3.007,71.149 5.007,71.149 7.007,71.149 9.007,71.149 18.507,71.149 19.507,71.149 27.507,71.149 28.507,71.149 36.507,71.149 37.507,71.149 38.507,71.149 47.007,71.149 63.007,71.149 67.007,71.149 69.007,71.149 71.007,71.149 75.007,71.149 77.007,71.149 79.007,71.149 81.007,71.149 83.007,71.149 18.007,72.149 19.007,72.149 20.007,72.149 27.007,72.149 28.007,72.149 29.007,72.149 37.007,72.149 38.007,72.149 2.007,73.149 4.007,73.149 6.007,73.149 8.007,73.149 48.007,73.149 50.007,73.149 66.007,73.149 74.007,73.149 76.007,73.149 78.007,73.149 80.007,73.149 82.007,73.149 3.007,75.149 5.007,75.149 7.007,75.149 9.007,75.149 11.007,75.149 13.007,75.149 15.007,75.149 17.007,75.149 19.007,75.149 21.007,75.149 63.007,75.149 67.007,75.149 69.007,75.149 71.007,75.149 73.007,75.149 75.007,75.149 77.007,75.149 79.007,75.149 81.007,75.149 83.007,75.149 2.007,77.149 4.007,77.149 6.007,77.149 8.007,77.149 10.007,77.149 12.007,77.149 14.007,77.149 62.007,77.149 64.007,77.149 66.007,77.149 68.007,77.149 70.007,77.149 72.007,77.149 74.007,77.149 76.007,77.149 78.007,77.149 80.007,77.149 82.007,77.149 7.007,79.149 9.007,79.149 11.007,79.149 13.007,79.149 15.007,79.149 17.007,79.149 19.007,79.149 21.007,79.149 23.007,79.149 25.007,79.149 27.007,79.149 29.007,79.149 31.007,79.149 33.007,79.149 35.007,79.149 37.007,79.149 39.007,79.149 41.007,79.149 43.007,79.149 45.007,79.149 49.007,79.149 51.007,79.149 53.007,79.149 55.007,79.149 57.007,79.149 59.007,79.149 61.007,79.149 63.007,79.149 65.007,79.149 67.007,79.149 69.007,79.149 71.007,79.149 73.007,79.149 75.007,79.149 77.007,79.149 8.007,81.149 10.007,81.149 12.007,81.149 14.007,81.149 16.007,81.149 18.007,81.149 20.007,81.149 22.007,81.149 24.007,81.149 26.007,81.149 28.007,81.149 30.007,81.149 32.007,81.149 34.007,81.149 36.007,81.149 38.007,81.149 40.007,81.149 42.007,81.149 50.007,81.149 52.007,81.149 54.007,81.149 56.007,81.149 58.007,81.149 60.007,81.149 62.007,81.149 64.007,81.149 66.007,81.149 68.007,81.149 70.007,81.149 72.007,81.149 74.007,81.149 76.007,81.149 7.007,83.149 9.007,83.149 11.007,83.149 13.007,83.149 15.007,83.149 17.007,83.149 19.007,83.149 21.007,83.149 23.007,83.149 25.007,83.149 27.007,83.149 29.007,83.149 31.007,83.149 33.007,83.149 35.007,83.149 37.007,83.149 39.007,83.149 41.007,83.149 43.007,83.149 51.007,83.149 53.007,83.149 55.007,83.149 57.007,83.149 59.007,83.149 61.007,83.149 63.007,83.149 65.007,83.149 67.007,83.149 69.007,83.149 71.007,83.149 73.007,83.149 75.007,83.149 77.007,83.149
  other v2: 6.475,0.647 7.475,0.647 8.475,0.647 9.475,0.647 10.475,0.647 11.475,0.647 12.475,0.647 13.475,0.647 14.475,0.647 15.475,0.647 16.475,0.647 17.475,0.647 18.474,0.647 19.474,0.647 20.474,0.647 21.474,0.647 22.474,0.647 23.474,0.647 24.474,0.647 25.474,0.647 26.474,0.647 27.474,0.647 28.474,0.647 29.474,0.647 30.474,0.647 31.474,0.647 32.474,0.647 33.474,0.647 34.474,0.647 35.474,0.647 36.474,0.647 37.474,0.647 38.474,0.647 39.474,0.647 45.474,0.647 46.474,0.647 47.474,0.647 48.474,0.647 49.474,0.647 50.474,0.647 51.474,0.647 52.474,0.647 53.474,0.647 54.474,0.647 55.474,0.647 56.474,0.647 57.474,0.647 58.474,0.647 59.474,0.647 60.474,0.647 61.474,0.647 62.474,0.647 63.474,0.647 64.474,0.647 65.474,0.647 66.474,0.647 67.474,0.647 68.474,0.647 69.474,0.647 70.474,0.647 71.474,0.647 72.474,0.647 73.474,0.647 74.474,0.647 75.474,0.647 76.474,0.647 77.474,0.647 78.474,0.647 84.353,6.139 0.647,6.209 84.353,7.139 0.647,7.209 84.353,8.139 0.647,8.209 84.353,9.139 0.647,9.209 84.353,10.139 0.647,10.209 84.353,11.139 0.647,11.209 84.353,12.139 0.647,12.209 84.353,13.139 0.647,13.209 84.353,14.139 0.647,14.209 84.353,15.139 0.647,15.209 84.353,16.139 0.647,16.209 84.353,17.139 0.647,17.209 84.353,18.139 0.647,18.209 84.353,19.139 0.647,19.209 84.353,20.139 0.647,20.209 84.353,21.139 0.647,21.209 84.353,22.139 0.647,22.209 84.353,23.139 0.647,23.209 84.353,28.139 0.647,28.209 84.353,29.139 0.647,29.209 84.353,30.139 0.647,30.209 84.353,31.139 0.647,31.209 84.353,32.139 0.647,32.209 84.353,33.139 0.647,33.209 0.647,34.209 84.353,39.139 0.647,39.209 84.353,40.139 0.647,40.209 84.353,41.139 0.647,41.209 84.353,42.139 0.647,42.209 84.353,43.139 0.647,43.209 84.353,44.139 0.647,44.209 84.353,45.139 0.647,45.209 84.353,46.139 0.647,46.209 84.353,47.139 0.647,47.209 84.353,48.139 0.647,48.209 84.353,49.139 0.647,49.209 84.337,50.139 0.647,50.209 83.373,50.402 82.407,50.548 0.647,51.209 81.795,51.338 0.647,52.209 81.765,52.338 0.647,53.209 81.765,53.338 0.647,54.209 81.765,54.338 0.647,55.209 81.765,55.338 0.647,56.209 81.765,56.338 0.647,57.209 81.765,57.338 0.647,58.209 81.765,58.338 0.647,59.209 81.765,59.338 0.647,60.209 81.765,60.338 0.647,61.209 81.765,61.338 0.647,62.209 81.765,62.338 0.647,63.209 81.765,63.338 0.647,64.209 81.765,64.338 0.647,65.209 81.765,65.338 0.647,66.209 81.765,66.338 0.647,67.209 81.888,67.33 82.677,67.945 83.65,67.953 0.647,68.209 84.353,68.665 0.647,69.209 84.353,69.665 0.647,70.209 84.353,70.665 0.647,71.209 84.353,71.665 0.647,72.209 84.353,72.665 0.647,73.209 84.353,73.665 0.647,74.209 84.353,74.665 0.647,75.209 84.353,75.665 0.647,76.209 84.353,76.665 0.647,77.209 84.353,77.665 0.647,78.209 84.353,78.665 0.647,79.209 5.802,84.353 6.802,84.353 7.802,84.353 8.802,84.353 9.802,84.353 10.802,84.353 11.802,84.353 12.802,84.353 13.802,84.353 14.802,84.353 15.802,84.353 16.802,84.353 17.802,84.353 18.802,84.353 19.802,84.353 20.802,84.353 21.802,84.353 22.802,84.353 23.802,84.353 24.802,84.353 25.802,84.353 26.802,84.353 27.802,84.353 28.802,84.353 29.802,84.353 30.802,84.353 31.802,84.353 32.802,84.353 33.802,84.353 34.802,84.353 35.802,84.353 36.802,84.353 37.802,84.353 38.802,84.353 39.802,84.353 40.802,84.353 41.802,84.353 42.802,84.353 49.802,84.353 50.802,84.353 51.802,84.353 52.802,84.353 53.802,84.353 54.802,84.353 55.802,84.353 56.802,84.353 57.802,84.353 58.802,84.353 59.802,84.353 60.802,84.353 61.802,84.353 62.802,84.353 63.802,84.353 64.802,84.353 65.802,84.353 66.802,84.353 67.802,84.353 68.802,84.353 69.802,84.353 70.802,84.353 71.802,84.353 72.802,84.353 73.802,84.353 74.802,84.353 75.802,84.353 76.802,84.353 77.802,84.353 78.802,84.353
MISO_PD: D3.1 J2.5 TP8.1 U6.13 | length 91.6
  L1_TOP w0.33: v1(40.767,15.55) U6.13@42.102,15.55
  L1_TOP w0.61: v1(71.263,58.854) D3.1@72.138,58.854 ; D3.1@72.163,58.854 72.484,59.175 J2.5@75.095,59.175
  L3_SIGNAL w0.381: v1(71.263,12.192) v1(71.263,58.854)
  L4_BOT w0.33: v1(40.767,15.55) 44.125,12.192 v1(71.263,12.192)
  L4_BOT w0.381: v1(64.77,55.755) 67.869,58.854 v1(71.263,58.854)
MOSI_PD: D4.3 J2.4 TP7.1 U5.3 U6.12 | length 105.8
  L1_TOP w0.33: U6.12@42.102,16.2 v1(43.152,16.2)
  L1_TOP w0.381: v1(55.945,34.881) U5.3@55.945,36.281
  L1_TOP w0.61: TP7.1@64.77,50.8 68.199,50.8 70.888,53.489 70.888,57.155 ; v1(70.485,57.155) 70.888,57.155 ; D4.3@72.138,57.155 70.888,57.155 ; D4.3@72.163,57.155 72.934,57.925 J2.4@75.095,57.925
  L3_SIGNAL w0.381: v1(70.485,12.827) v1(70.485,34.881) v1(70.485,57.155)
  L4_BOT w0.33: v1(43.152,16.2) 46.525,12.827 v1(70.485,12.827)
  L4_BOT w0.381: v1(55.945,34.881) v1(70.485,34.881)
NetC1_2: C1.2 R2.2 R3.1 | length 3.8
  L1_TOP w0.61: C1.2@54.085,14.402 R2.2@57.895,14.402
NetC2_1: C2.1 C5.2 | length 1.7
  L1_TOP w0.61: C5.2@50.898,66.476 C2.1@52.632,66.476
NetC3_1: C3.1 C6.2 | length 2.8
  L1_TOP w0.61: C6.2@49.164,66.476 C3.1@49.164,69.324
NetC4_2: C4.2 R3.2 U1.12 | length 7.2
  L1_TOP w0.381: R3.2@55.99,16.002 v1(55.99,17.243) U1.12@55.99,18.275 ; C4.2@59.69,16.002 v1(59.69,17.199)
  L4_BOT w0.381: v1(55.99,17.243) 56.034,17.199 v1(59.69,17.199)
NetC7_2: C7.2 R4.2 R5.1 TP2.1 | length 8.8
  L1_TOP w0.61: R5.1@62.099,19.977 R4.2@62.099,21.679 C7.2@62.099,23.381 62.099,25.708 63.06,26.67 TP2.1@64.77,26.67
NetC8_2: C8.2 R5.2 U1.14 | length 6.4
  L1_TOP w0.381: U1.14@57.26,18.275 57.27,18.285 57.27,19.583 57.664,19.977 R5.2@60.499,19.977
  L1_TOP w0.61: C8.2@60.499,18.275 R5.2@60.499,19.977
NetC9_1: C9.1 C12.2 | length 1.9
  L1_TOP w0.61: C12.2@51.046,25.654 C9.1@52.975,25.654
NetC10_1: C10.1 C13.2 | length 1.9
  L1_TOP w0.61: C13.2@51.046,27.432 C10.1@52.975,27.432
NetC11_2: C11.2 R4.1 R8.2 U1.1 | length 8.3
  L1_TOP w0.381: R8.2@59.495,27.559 C11.2@59.495,25.654 59.495,24.682 58.903,24.09 58.54,24.09 58.53,24.081 U1.1@58.53,23.381 58.53,21.958 58.809,21.679 R4.1@60.499,21.679
NetC14_1: C14.1 C16.2 | length 1.7
  L1_TOP w0.61: C16.2@50.898,52.076 C14.1@52.632,52.076
NetC15_1: C15.1 C17.2 | length 2.8
  L1_TOP w0.61: C17.2@49.164,52.076 C15.1@49.164,54.924
NetC18_1: C18.1 C20.2 | length 1.8
  L1_TOP w0.61: C18.1@52.654,19.68 C20.2@52.654,21.455
NetC19_1: C19.1 C21.2 | length 2
  L1_TOP w0.61: C21.2@47.502,23.965 47.552,23.965 47.641,23.876 C19.1@49.454,23.876
NetC23_1: C23.1 C25.2 | length 1.7
  L1_TOP w0.61: C25.2@50.898,37.676 C23.1@52.632,37.676
NetC24_1: C24.1 C26.2 | length 2.8
  L1_TOP w0.61: C26.2@49.164,37.676 C24.1@49.164,40.524
NetC27_1: C27.1 C30.2 | length 2.3
  L1_TOP w0.61: C27.1@43.702,12.192 C30.2@46.052,12.192
NetC28_1: C28.1 C31.2 | length 2.2
  L1_TOP w0.61: C28.1@51.892,12.192 C31.2@54.085,12.192
NetC29_1: C29.1 R17.1 U6.4 | length 4.3
  L1_TOP w0.33: U6.4@47.802,15.55 49.79,15.55 50.242,16.002 C29.1@50.292,16.002
  L1_TOP w0.61: C29.1@50.292,16.002 50.292,17.485 50.381,17.574 R17.1@50.381,17.624
NetC29_2: C29.2 R16.1 U6.3 | length 4.6
  L1_TOP w0.33: U6.3@47.802,14.9 49.744,14.9 50.26,14.384 C29.2@50.31,14.384
  L1_TOP w0.61: C29.2@50.31,14.384 52.178,14.384 R16.1@52.197,14.365
NetC33_1: C33.1 D5.2 L1.1 U7.8
NetC33_2: C33.2 U7.1 | length 3.8
  L1_TOP w0.61: C33.2@17.457,15.602 18.609,15.602 19.482,16.475 U7.1@19.482,17.911
NetC34_1: C34.1 C38.2 | length 1.9
  L1_TOP w0.61: C38.2@9.449,17.253 C34.1@9.449,19.181
NetC35_1: C35.1 C39.2 | length 2.7
  L1_TOP w0.61: C35.1@24.46,13.932 C39.2@27.181,13.932
NetC40_1: C40.1 C44.2 | length 2.7
  L1_TOP w0.61: C44.2@34.322,13.824 34.323,13.823 36.991,13.823 C40.1@36.993,13.822
NetC41_1: C41.1 C45.2 | length 2.7
  L1_TOP w0.61: C45.2@34.322,23.692 C41.1@36.993,23.692
NetC47_1: C47.1 U9.2 | length 3
  L1_TOP w0.61: U9.2@26.705,20.694 26.709,20.689 26.709,17.832 C47.1@26.831,17.71
NetC47_2: C47.2 U9.4 | length 3
  L1_TOP w0.61: C47.2@29.118,17.71 29.24,17.832 29.24,20.689 U9.4@29.245,20.694
NetJ1_3: J1.3 R11.1 | length 16.3
  L1_TOP w0.61: R11.1@45.702,25.654 v1(46.228,25.654)
  L3_SIGNAL w0.381: v1(46.222,9.887) v1@46.222,25.648
  L3_SIGNAL w0.61: v1@46.222,25.648 v1(46.228,25.654)
NetPD1_2: PD1.2 U2.20 | length 23
  L1_TOP w0.381: U2.20@57.245,70.719 v1(57.245,74.13)
  L4_BOT w0.381: PD1.2@42.102,71.628 42.102,73.322 42.91,74.13 v1(57.245,74.13)
  L4_BOT w0.4: PD1.2@43.102,70.5 PD1.2@44.312,70.5 ; PD1.2@43.102,72.5 PD1.2@44.312,72.5
NetPD2_2: PD2.2 U2.18 | length 35.3
  L1_TOP w0.381: U2.18@58.545,70.719 v1(58.545,74.966)
  L4_BOT w0.381: PD2.2@32.768,71.628 32.768,74.109 33.625,74.966 v1(58.545,74.966)
  L4_BOT w0.4: PD2.2@33.768,70.5 PD2.2@34.978,70.5 ; PD2.2@33.768,72.5 PD2.2@34.978,72.5
NetPD3_2: PD3.2 U2.16 | length 47.5
  L1_TOP w0.381: U2.16@59.845,70.719 v1(59.845,75.781)
  L4_BOT w0.381: PD3.2@23.434,71.628 23.434,74.931 24.284,75.781 v1(59.845,75.781)
  L4_BOT w0.4: PD3.2@24.434,70.628 PD3.2@25.644,70.628 ; PD3.2@24.434,72.628 PD3.2@25.644,72.628
NetPD4_2: PD4.2 U2.14 | length 59.8
  L1_TOP w0.381: U2.14@61.145,70.719 v1(61.145,76.563)
  L4_BOT w0.381: PD4.2@14.1,71.628 14.1,75.8 14.863,76.563 v1(61.145,76.563) ; PD4.2@15.1,70.628 PD4.2@16.31,70.628 ; PD4.2@15.1,72.628 PD4.2@16.31,72.628
NetPD5_2: PD5.2 U2.5 | length 21.3
  L1_TOP w0.381: U2.5@57.245,65.081 v1(57.245,66.802)
  L4_BOT w0.381: PD5.2@42.102,64.3 42.102,65.994 42.91,66.802 v1(57.245,66.802)
  L4_BOT w0.4: PD5.2@43.102,63.3 PD5.2@44.312,63.3 ; PD5.2@43.102,65.3 PD5.2@44.312,65.3
NetPD6_2: PD6.2 U2.7 | length 33.6
  L1_TOP w0.381: U2.7@58.545,65.081 v1(58.545,67.638)
  L4_BOT w0.381: PD6.2@32.768,64.3 32.768,66.781 33.625,67.638 v1(58.545,67.638)
  L4_BOT w0.4: PD6.2@33.768,63.3 PD6.2@34.978,63.3 ; PD6.2@33.768,65.3 PD6.2@34.978,65.3
NetPD7_2: PD7.2 U2.9 | length 45.9
  L1_TOP w0.381: U2.9@59.845,65.081 v1(59.845,68.453)
  L4_BOT w0.381: PD7.2@23.434,64.3 23.434,67.603 24.284,68.453 v1(59.845,68.453)
  L4_BOT w0.4: PD7.2@24.434,63.3 PD7.2@25.644,63.3 ; PD7.2@24.434,65.3 PD7.2@25.644,65.3
NetPD8_2: PD8.2 U2.11 | length 58.1
  L1_TOP w0.381: U2.11@61.145,65.081 v1(61.145,69.235)
  L4_BOT w0.381: PD8.2@14.1,64.3 14.1,68.472 14.863,69.235 v1(61.145,69.235)
  L4_BOT w0.4: PD8.2@15.1,63.3 PD8.2@16.31,63.3 ; PD8.2@15.1,65.3 PD8.2@16.31,65.3
NetPD9_2: PD9.2 U3.20 | length 23
  L1_TOP w0.381: U3.20@57.245,56.191 v1(57.245,59.602)
  L4_BOT w0.381: PD9.2@42.102,57.1 42.102,58.794 42.91,59.602 v1(57.245,59.602)
  L4_BOT w0.4: PD9.2@43.102,56.1 PD9.2@44.312,56.1 ; PD9.2@43.102,58.1 PD9.2@44.312,58.1
NetPD10_2: PD10.2 U3.18 | length 35.3
  L1_TOP w0.381: U3.18@58.545,56.191 v1(58.545,60.438)
  L4_BOT w0.381: PD10.2@32.768,57.1 32.768,59.581 33.625,60.438 v1(58.545,60.438)
  L4_BOT w0.4: PD10.2@33.768,56.1 PD10.2@34.978,56.1 ; PD10.2@33.768,58.1 PD10.2@34.978,58.1
NetPD11_2: PD11.2 U3.16 | length 47.5
  L1_TOP w0.381: U3.16@59.845,56.191 v1(59.845,61.253)
  L4_BOT w0.381: PD11.2@23.434,57.1 23.434,60.403 24.284,61.253 v1(59.845,61.253)
  L4_BOT w0.4: PD11.2@24.434,56.1 PD11.2@25.644,56.1 ; PD11.2@24.434,58.1 PD11.2@25.644,58.1
NetPD12_2: PD12.2 U3.14 | length 59.8
  L1_TOP w0.381: U3.14@61.145,56.191 v1(61.145,62.035)
  L4_BOT w0.381: PD12.2@14.1,57.1 14.1,61.272 14.863,62.035 v1(61.145,62.035)
  L4_BOT w0.4: PD12.2@15.1,56.1 PD12.2@16.31,56.1 ; PD12.2@15.1,58.1 PD12.2@16.31,58.1
NetPD13_2: PD13.2 U3.5 | length 21.3
  L1_TOP w0.381: U3.5@57.245,50.681 v1(57.245,52.402)
  L4_BOT w0.381: PD13.2@42.102,49.9 42.102,51.594 42.91,52.402 v1(57.245,52.402)
  L4_BOT w0.4: PD13.2@43.102,48.9 PD13.2@44.312,48.9 ; PD13.2@43.102,50.9 PD13.2@44.312,50.9
NetPD14_2: PD14.2 U3.7 | length 33.6
  L1_TOP w0.381: U3.7@58.545,50.681 v1(58.545,53.238)
  L4_BOT w0.381: PD14.2@32.768,49.9 32.768,52.381 33.625,53.238 v1(58.545,53.238)
  L4_BOT w0.4: PD14.2@33.768,48.9 PD14.2@34.978,48.9 ; PD14.2@33.768,50.9 PD14.2@34.978,50.9
NetPD15_2: PD15.2 U3.9 | length 45.9
  L1_TOP w0.381: U3.9@59.845,50.681 v1(59.845,54.053)
  L4_BOT w0.381: PD15.2@23.434,49.9 23.434,53.203 24.284,54.053 v1(59.845,54.053)
  L4_BOT w0.4: PD15.2@24.434,48.9 PD15.2@25.644,48.9 ; PD15.2@24.434,50.9 PD15.2@25.644,50.9
NetPD16_2: PD16.2 U3.11 | length 58.1
  L1_TOP w0.381: U3.11@61.145,50.681 v1(61.145,54.835)
  L4_BOT w0.381: PD16.2@14.1,49.9 14.1,54.072 14.863,54.835 v1(61.145,54.835)
  L4_BOT w0.4: PD16.2@15.1,48.9 PD16.2@16.31,48.9 ; PD16.2@15.1,50.9 PD16.2@16.31,50.9
NetPD17_2: PD17.2 U5.20 | length 23
  L1_TOP w0.381: U5.20@57.245,41.791 v1(57.245,45.202)
  L4_BOT w0.381: PD17.2@42.102,42.7 42.102,44.394 42.91,45.202 v1(57.245,45.202)
  L4_BOT w0.4: PD17.2@43.102,41.7 PD17.2@44.312,41.7 ; PD17.2@43.102,43.7 PD17.2@44.312,43.7
NetPD18_2: PD18.2 U5.18 | length 35.3
  L1_TOP w0.381: U5.18@58.545,41.791 v1(58.545,46.038)
  L4_BOT w0.381: PD18.2@32.768,42.7 32.768,45.181 33.625,46.038 v1(58.545,46.038)
  L4_BOT w0.4: PD18.2@33.768,41.7 PD18.2@34.978,41.7 ; PD18.2@33.768,43.7 PD18.2@34.978,43.7
NetPD19_2: PD19.2 U5.16 | length 47.5
  L1_TOP w0.381: U5.16@59.845,41.791 v1(59.845,46.853)
  L4_BOT w0.381: PD19.2@23.434,42.7 23.434,46.003 24.284,46.853 v1(59.845,46.853)
  L4_BOT w0.4: PD19.2@24.434,41.7 PD19.2@25.644,41.7 ; PD19.2@24.434,43.7 PD19.2@25.644,43.7
NetPD20_2: PD20.2 U5.14 | length 59.8
  L1_TOP w0.381: U5.14@61.145,41.791 v1(61.145,47.635)
  L4_BOT w0.381: PD20.2@14.1,42.7 14.1,46.872 14.863,47.635 v1(61.145,47.635)
  L4_BOT w0.4: PD20.2@15.1,41.7 PD20.2@16.31,41.7 ; PD20.2@15.1,43.7 PD20.2@16.31,43.7
NetPD21_2: PD21.2 U5.5 | length 21.3
  L1_TOP w0.381: U5.5@57.245,36.281 v1(57.245,38.002)
  L4_BOT w0.381: PD21.2@42.102,35.5 42.102,37.194 42.91,38.002 v1(57.245,38.002)
  L4_BOT w0.4: PD21.2@43.102,34.5 PD21.2@44.312,34.5 ; PD21.2@43.102,36.5 PD21.2@44.312,36.5
NetPD22_2: PD22.2 U5.7 | length 33.6
  L1_TOP w0.381: U5.7@58.545,36.281 v1(58.545,38.838)
  L4_BOT w0.381: PD22.2@32.768,35.5 32.768,37.981 33.625,38.838 v1(58.545,38.838)
  L4_BOT w0.4: PD22.2@33.768,34.5 PD22.2@34.978,34.5 ; PD22.2@33.768,36.5 PD22.2@34.978,36.5
NetPD23_2: PD23.2 U5.9 | length 45.9
  L1_TOP w0.381: U5.9@59.845,36.281 v1(59.845,39.653)
  L4_BOT w0.381: PD23.2@23.434,35.5 23.434,38.803 24.284,39.653 v1(59.845,39.653)
  L4_BOT w0.4: PD23.2@24.434,34.5 PD23.2@25.644,34.5 ; PD23.2@24.434,36.5 PD23.2@25.644,36.5
NetPD24_2: PD24.2 U5.11 | length 58.1
  L1_TOP w0.381: U5.11@61.145,36.281 v1(61.145,40.435)
  L4_BOT w0.381: PD24.2@14.1,35.5 14.1,39.672 14.863,40.435 v1(61.145,40.435)
  L4_BOT w0.4: PD24.2@15.1,34.5 PD24.2@16.31,34.5 ; PD24.2@15.1,36.5 PD24.2@16.31,36.5
NetR2_1: R2.1 U1.15 U1.16 | length 2.8
  L1_TOP w0.381: R2.1@57.895,16.002 U1.15@57.895,18.275 58.42,18.275 U1.16@58.42,18.288
NetR6_1: R6.1 U2.23 | length 8.1
  L1_TOP w0.381: R6.1@52.632,70.924 52.632,73.356 53.032,73.756 54.895,73.756 55.295,73.356 U2.23@55.295,70.719
NetR10_1: R10.1 U3.23 | length 8.1
  L1_TOP w0.381: R10.1@52.632,56.524 52.632,58.956 53.032,59.356 54.895,59.356 55.295,58.956 U3.23@55.295,56.319
NetR11_2: R11.2 R12.2 R13.2 | length 4
  L1_TOP w0.61: R12.2@44.102,21.699 R11.2@44.102,25.654